# Altium PCB PCB.PcbDoc
Units mm, origin at the board's own origin, x right, y up, seen from the top; angles counter-clockwise.
Board outline 80 x 34 mm, 2 copper layers (Top Layer, Bottom Layer); 41 components, 44 nets, 176 pads, 12 vias.
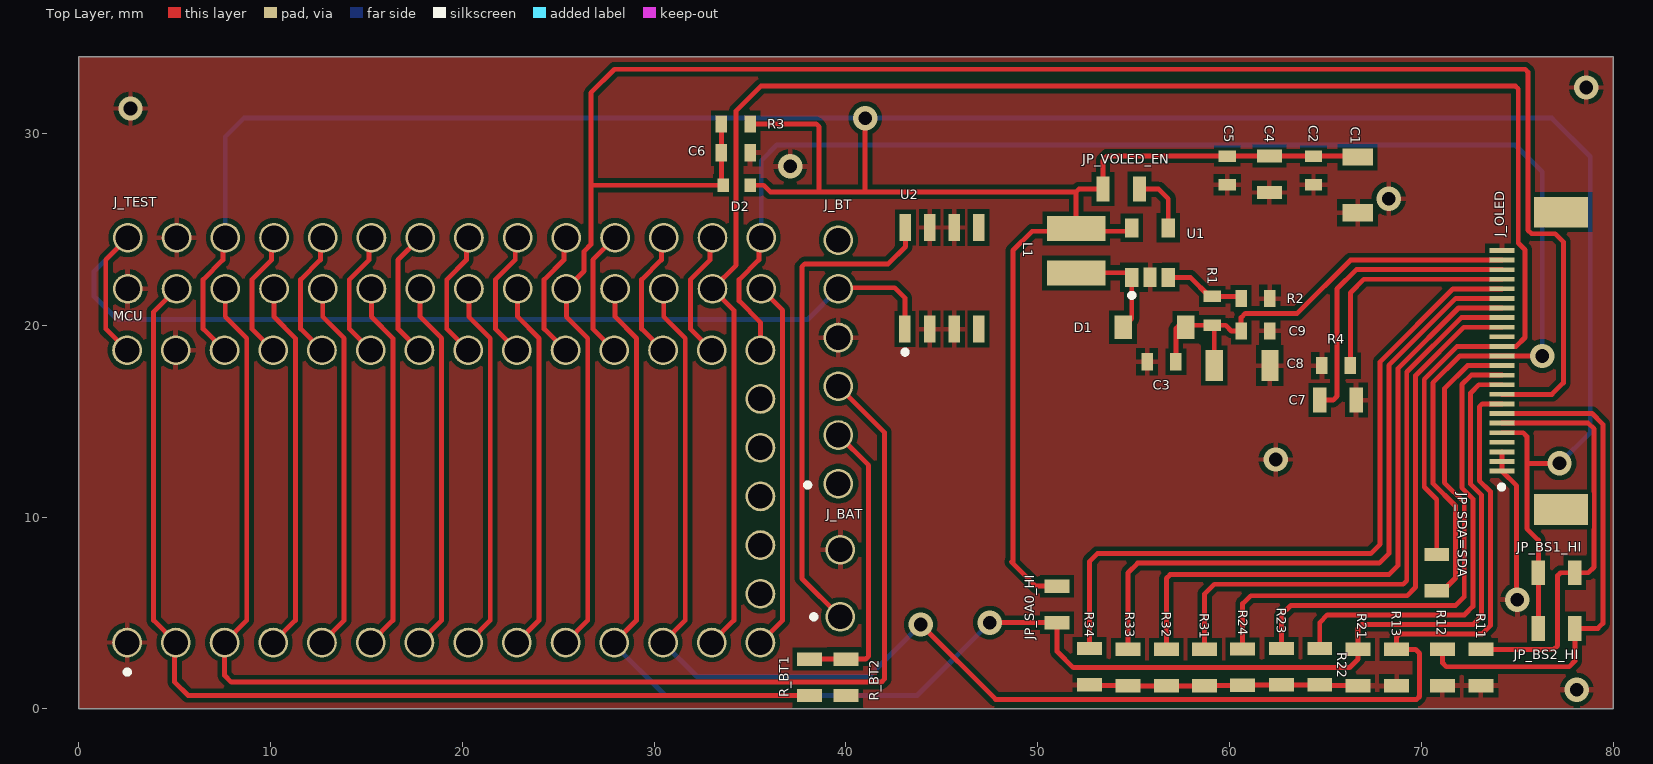
[diagram p0: Top Layer view]
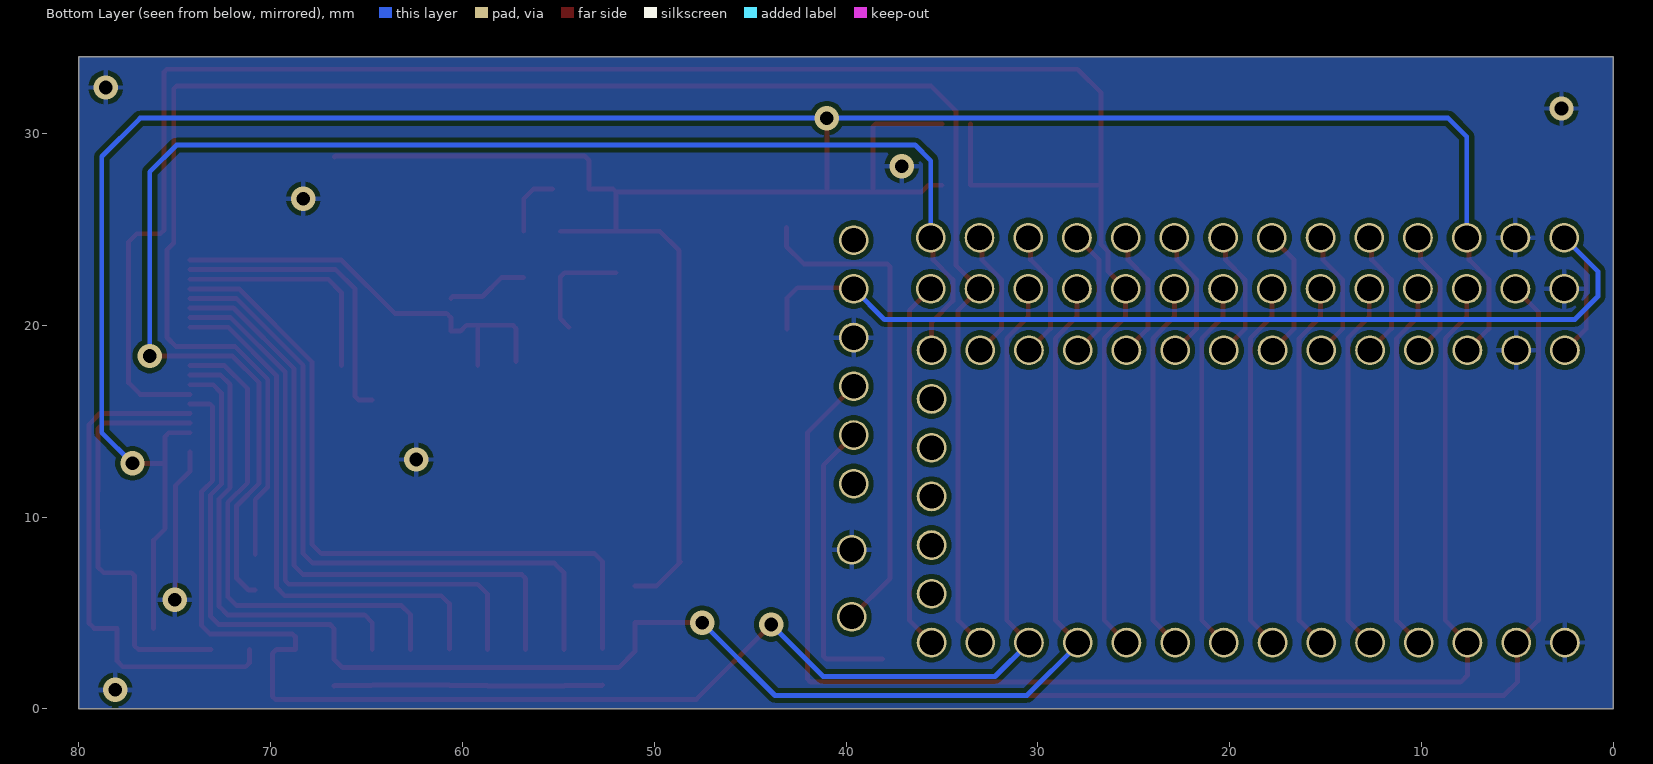
[diagram p1: Bottom Layer view, seen from below]

## Layer stack, top to bottom
Top Solder: solder mask 0.0102, Solder Resist, Dk 3.5
Top Layer: signal copper 0.0356
Dielectric 1: dielectric 0.32, FR-4, Dk 4.8
Bottom Layer: signal copper 0.0356
Bottom Solder: solder mask 0.0102, Solder Resist, Dk 3.5

## Board outline
0,0 80,0 80,34 0,34

## Design rules (kind name [scope] priority, off if disabled: settings)
Clearance [All] p1: gap=0.254 ignorepadtopadclearanceinfootprint=FALSE except(0: Arc-Hole Track-Hole SMDPad-Hole THPad-Hole Via-Hole Fill-Hole Poly-Hole Region-Hole Text-Hole; 0.2: Arc-Arc Arc-Track Arc-SMDPad Track-Track Track-SMDPad SMDPad-SMDPad)
PolygonConnect [All] p1: connectstyle=Relief reliefconductorwidth=0.254 reliefentries=4 polygonreliefangle="90 Angle" airgapwidth=0.254
RoutingVias [All] p1: holewidth=0.711 width=1.27 viastyle="Through Hole" minholewidth=0.711 minwidth=1.27 maxholewidth=0.711 maxwidth=1.27
SolderMaskExpansion [All] p1: expansion=0.102 istentingtop=FALSE
Width [All] p1: maxlimit=0.254 minlimit=0.254 preferedwidth=0.254
30 further rules are at their usual default settings.

## Classes and differential pairs
component class OLED_BREAKOUT: C1 C2 C3 C4 C5 C6 C7 C8 C9 D1 D2 J_OLED JP_BS1_HI JP_BS2_HI JP_SA0_HI JP_SDA=SDA JP_VOLED_EN L1 R1 R2 R3 R4 R11 R12 R13 R21 R22 R23 R24 R31 R32 R33 R34 U1
component class MCU: J_BAT J_BT J_TEST MCU R_BT1 R_BT2 U2

## Components (designator, comment, footprint, x,y, rotation, side; value= is the part's Value field where it differs from the comment)
C1 "Capacitor" SMD-1206 66.673,26.323 r90 top
C2 "Capacitor" SMD-0603 64.373,27.625 r90 top
C3 "Capacitor" SMD-0603 56,18.1 r0 top
C4 "Capacitor" SMD-0805 62.073,27.275 r90 top
C5 "Capacitor" SMD-0603 59.873,27.625 r90 top
C6 "Capacitor" SMD-0603 34.7,29 r180 top
C7 "Capacitor" SMD-0805 66.25,16.1 r180 top
C8 "Capacitor" SMD-1206 61.65,17.9 r180 top
C9 "Capacitor" SMD-0603 61.8,19.7 r180 top
D1 "Diode Schottky" D1_SOD-123 54.9,19.9 r0 top
D2 "Diode Schottky" D2_SOD523 33.9,27.3 r0 top
J_BAT "9V CONN" 2POS_TERMINAL 39.7,4.8 r90 top
J_BT "BLUETOOTH" HC05 39.6,11.74 r90 top
J_OLED "OLED Connector" J_OLED 74.23,17.91 r90 top
J_TEST "Test Pins" TESTPINS 2.56,24.567 r0 top
JP_BS1_HI "Jumper" SMD-0805 76.45,7.1 r0 top
JP_BS2_HI "Jumper" SMD-0805 76.45,4.2 r0 top
JP_SA0_HI "Jumper" SMD-0805 51,4.85 r90 top
JP_SDA=SDA "Jumper" SMD-0805 70.8,6.5 r90 top
JP_VOLED_EN "Jumper" SMD-0805 54.95,27.1 r180 top
L1 "Inductor" L1 52,24.4 r270 top
MCU "Teensy 4.0" "TEENSY 4.0" 2.52,18.7 r0 top
R1 "Resistor" SMD-0603 59.1,21.2 r270 top
R2 "Resistor" SMD-0603 61.798,21.4 r180 top
R3 "Resistor" SMD-0603 33.802,30.5 r0 top
R4 "Resistor" SMD-0603 65.1,17.9 r0 top
R11 "Resistor" SMD-0805 73.1,2.75 r270 top
R12 "Resistor" SMD-0805 71.1,2.75 r270 top
R13 "Resistor" SMD-0805 68.7,2.75 r270 top
R21 "Resistor" SMD-0805 66.7,2.75 r270 top
R22 "Resistor" SMD-0805 64.7,2.8 r270 top
R23 "Resistor" SMD-0805 62.7,2.8 r270 top
R24 "Resistor" SMD-0805 60.673,2.775 r270 top
R31 "Resistor" SMD-0805 58.7,2.75 r270 top
R32 "Resistor" SMD-0805 56.7,2.75 r270 top
R33 "Resistor" SMD-0805 54.7,2.75 r270 top
R34 "Resistor" SMD-0805 52.7,2.8 r270 top
R_BT1 "1K" SMD-0805 38.1,1.05 r90 top
R_BT2 "2K" SMD-0805 40,1.05 r90 top
U1 "DC/DC Voltage Regulator" U1_SOT-23-5 55.86,23.78 r0 top
U2 "5V Voltage Regulator 9V Battery" U2_SO-8 43.1,19.8 r0 top

## Footprints (in the part's own frame and the unit in brackets; to place one, negate y for a bottom-side part, rotate by r counter-clockwise, add the part's x,y. Pads: shape width x height; smd on the part's side, far side on the other; paste and mask are expansions set on the pad)
2POS_TERMINAL [mm]
  round 1.55 hole 1.28: 1(0,0) 2(3.5,0)
  silkscreen extent -0.11,1.27 0.11,1.49
D1_SOD-123 [mm]
  rect 0.91x1.22 smd: 1(-0.456,0) 2(2.815,0)
D2_SOD523 [mm]
  rect 0.6x0.7 smd: 1(-0.3,0) 2(1.1,0)
HC05 [mm]
  round 1.55 hole 1.28: 1(0,0) 2(2.54,0) 3(5.08,0) 4(7.62,0) 5(10.16,0) 6(12.7,0)
  silkscreen extent -0.18,1.49 0.04,1.71
J_OLED [mm]
  rect 0.25x1.3 smd: 1(-5.51,0.03) 2(-5.01,0.03) 3(-4.51,0.03) 4(-4.01,0.03) 5(-3.51,0.03) 6(-3.01,0.03) 7(-2.51,0.03) 8(-2.01,0.03) 9(-1.51,0.03) 10(-1.01,0.03) 11(-0.51,0.03) 12(-0.01,0.03) 13(0.49,0.03) 14(0.99,0.03) 15(1.49,0.03) 16(1.99,0.03) 17(2.49,0.03) 18(2.99,0.03) 19(3.49,0.03) 20(3.99,0.03) 21(4.49,0.03) 22(4.99,0.03) 23(5.49,0.03) 24(5.99,0.03)
  rect 1.6x2.8 smd: 25(-7.51,-3.05) 26(7.99,-3.05)
  silkscreen extent -6.45,-0.06 -6.23,0.16
L1 [mm]
  rect 1.3x3.05 smd: 1(-0.65,0) 2(1.67,0)
SMD-0603 [mm]
  rect 0.6x0.9 smd: 1(-0.302,0) 2(1.2,0)
SMD-0805 [mm]
  rect 0.7x1.3 smd: 1(-0.35,0) 2(1.55,0)
SMD-1206 [mm]
  rect 0.9x1.6 smd: 1(-0.45,0) 2(2.45,0)
"TEENSY 4.0" [mm]
  round 1.55 hole 1.28: 0(2.54,-15.24) 1(5.08,-15.24) 2(7.62,-15.24) 3(10.16,-15.24) 4(12.7,-15.24) 5(15.24,-15.24) 6(17.78,-15.24) 7(20.32,-15.24) 8(22.86,-15.24) 9(25.4,-15.24) 10(27.94,-15.24) 11(30.48,-15.24) 12(33.02,-15.24) 13(33.02,0) 14(30.48,0) 15(27.94,0) 16(25.4,0) 17(22.86,0) 18(20.32,0) 19(17.78,0) 20(15.24,0) 21(12.7,0) 22(10.16,0) 23(7.62,0) 24(5.08,0) 25(2.54,0) 26(0,0) 27(0,-15.24) 28(33.02,-12.7) 29(33.02,-10.16) 30(33.02,-7.62) 31(33.02,-5.08) 32(33.02,-2.54)
  silkscreen extent -0.1,-16.89 0.12,-16.67
TESTPINS [mm]
  round 1.55 hole 1.28: 0(2.54,-2.667) 1(5.08,-2.667) 2(7.62,-2.667) 3(10.16,-2.667) 4(12.7,-2.667) 5(15.24,-2.667) 6(17.78,-2.667) 7(20.32,-2.667) 8(22.86,-2.667) 9(25.4,-2.667) 10(27.94,-2.667) 11(30.48,-2.667) 12(33.02,-2.667) 13(33.02,0) 14(30.48,0) 15(27.94,0) 16(25.4,0) 17(22.86,0) 18(20.32,0) 19(17.78,0) 20(15.24,0) 21(12.7,0) 22(10.16,0) 23(7.62,0) 24(5.08,0) 25(2.54,0) 26(0,0) 27(0,-2.667)
U1_SOT-23-5 [mm]
  rect 0.7x1 smd: 1(-0.96,-1.28) 2(-0.01,-1.279) 3(0.94,-1.28) 4(0.94,1.3) 5(-0.96,1.3)
  silkscreen extent -1.07,-2.33 -0.85,-2.11
U2_SO-8 [mm]
  rect 0.6x1.4 smd: 1(-0.03,0) 2(1.27,0) 3(2.54,0) 4(3.81,0) 5(3.81,5.3) 6(2.54,5.3) 7(1.27,5.3) 8(0,5.3)
  silkscreen extent -0.13,-1.31 0.09,-1.09

## Part data
C1: Capactiance=10uF, Size=1206
C2 C3: Capacitance=1uF, Size=0603
C4: Capacitance=4.6uF, Size=0805
C5 C6 C9: Capacitance=0.1uF, Size=0603
C7: Capacitance=4.7uF, Size=0805
C8: Capacitance=10uF, Size=1206
J_BAT: library part "Battery Connector"
J_BT: library part HC05
J_OLED: "24 Position, 0.5mm Pitch, Gold, FCC FPC ZIF Connector"
JP_BS1_HI JP_BS2_HI JP_SA0_HI JP_SDA=SDA JP_VOLED_EN: "Jumper Wire", LatestRevisionDate=17-Jul-2002, LatestRevisionNote="Re-released for DXP Platform.", PackageDescription="Radial Cap, Thru-Hole; 2 Leads; 0.2 in Pin Spacing", PackageReference=RAD-0.2, Published=24-Mar-1999, Publisher="Altium Limited"
L1: Inductance=10uH
R1: Resistance=47K, Size=0603
R2 R3: Resistance=5.1K, Size=0603
R4: Resistance=910K, Size=0603
R11 R12 R13 R21 R22 R23 R24 R31 R32 R33 R34: Resistance=100K, Size=0805
R_BT1 R_BT2: library part Resistor
U1: "Integrated Circuits (ICs) / PMIC - Voltage Regulators - DC DC Switching Regulators", Part#=AP3012KTR-G1

## Via types
v1: diameter 1.27, hole 0.711, Top Layer to Bottom Layer, 12 vias

## Nets (pads, with @x,y where several pads share a name; then routed paths per layer and width w, separated by ;. In a path a pad name is that pad's centre, name@x,y a point inside that pad or via, vN(x,y) a via of type N, cw(c..) or ccw(c..) an arc to the next point about the centre after c; other vN are vias at no path point)
2: J_TEST.2 MCU.2 | length 19.4
  Top Layer w0.254: MCU.2 11.296,4.616 11.296,19.327 10.18,20.443 J_TEST.2
3: J_TEST.3 MCU.3 | length 19.4
  Top Layer w0.254: MCU.3 13.836,4.616 13.836,19.327 12.72,20.443 J_TEST.3
4: J_TEST.4 MCU.4 | length 19.4
  Top Layer w0.254: MCU.4 16.376,4.616 16.376,19.327 15.26,20.443 J_TEST.4
5: J_TEST.5 MCU.5 | length 19.4
  Top Layer w0.254: MCU.5 18.916,4.616 18.916,19.327 17.8,20.443 J_TEST.5
5V: J_BT.5 J_TEST.26 MCU.26 U2.1 | length 55.9
  Top Layer w0.254: MCU.26 1.404,19.816 1.404,23.411 J_TEST.26 ; J_BT.5@39.6,21.96 42.54,21.96 43.07,21.43 U2.1
  Bottom Layer w0.254: J_TEST.26 0.8,22.807 0.8,21.5 2,20.3 38,20.3 J_BT.5
6: J_TEST.6 MCU.6 | length 19.4
  Top Layer w0.254: MCU.6 21.456,4.616 21.456,19.327 20.34,20.443 J_TEST.6
7: J_TEST.7 MCU.7 | length 19.4
  Top Layer w0.254: MCU.7 23.996,4.616 23.996,19.327 22.88,20.443 J_TEST.7
9V: J_BAT.1 U2.8 | length 25.9
  Top Layer w0.254: J_BAT.1 37.7,6.8 37.7,23.051 37.774,23.126 37.849,23.2 42.2,23.2 43.1,24.1 U2.8
12: J_TEST.12 MCU.12 | length 19.4
  Top Layer w0.254: MCU.12 36.696,4.616 36.696,20.784 J_TEST.12
14: J_TEST.14 MCU.14 | length 6.8
  Top Layer w0.254: MCU.14 31.884,19.816 31.884,22.379 32.916,23.411 32.916,24.443 J_TEST.14
15: J_TEST.15 MCU.15 | length 6.8
  Top Layer w0.254: MCU.15 29.344,19.816 29.344,22.379 30.376,23.411 30.376,24.443 J_TEST.15
16: J_TEST.16 MCU.16 | length 6.8
  Top Layer w0.254: MCU.16 26.804,19.816 26.804,23.411 J_TEST.16
17: J_TEST.17 MCU.17 | length 6.8
  Top Layer w0.254: MCU.17 24.264,19.816 24.264,22.379 25.296,23.411 25.296,24.443 J_TEST.17
18: J_TEST.18 MCU.18 | length 6.8
  Top Layer w0.254: MCU.18 21.724,19.816 21.724,22.379 22.756,23.411 22.756,24.443 J_TEST.18
19: J_TEST.19 MCU.19 | length 6.8
  Top Layer w0.254: MCU.19 19.184,19.816 19.184,22.379 20.216,23.411 20.216,24.443 J_TEST.19
20: J_TEST.20 MCU.20 | length 6.8
  Top Layer w0.254: MCU.20 16.644,19.816 16.644,23.411 J_TEST.20
21: J_TEST.21 MCU.21 | length 6.8
  Top Layer w0.254: MCU.21 14.104,19.816 14.104,22.379 15.136,23.411 15.136,24.443 J_TEST.21
22: J_TEST.22 MCU.22 | length 6.8
  Top Layer w0.254: MCU.22 11.564,19.816 11.564,22.379 12.596,23.411 12.596,24.443 J_TEST.22
23: J_TEST.23 MCU.23 | length 6.8
  Top Layer w0.254: MCU.23 9.024,19.816 9.024,22.379 10.056,23.411 10.056,24.443 J_TEST.23
+3.3V: C1.2 C2.2 C4.2 C5.2 D2.2 J_OLED.5 J_TEST.24 JP_BS1_HI.1 JP_BS2_HI.1 JP_SA0_HI.2 JP_VOLED_EN.2 L1.1 MCU.24 R3.2 U1.5 | length 186.8
  Top Layer w0.254: MCU.24 6.484,19.816 6.484,22.379 7.516,23.411 7.516,24.443 J_TEST.24 J_TEST.24@7.7,24.627 ; D2.2 35.707,27.3 36.049,26.959 38.6,26.959 ; R3.2 38.451,30.5 38.6,30.351 38.6,26.959 ; v1(41,30.8) 41,26.959 ; 48.626,7.674 49.9,6.4 JP_SA0_HI.2 ; 48.7,7.6 48.7,23.9 49.7,24.9 L1.1@52,24.9 ; U1.5@54.9,24.9 L1.1@52,24.9 ; C1.2 66.621,28.825 C2.2 C4.2 C5.2 53.625,28.825 53.4,28.6 JP_VOLED_EN.2 52.141,27.1 52,26.959 ; J_OLED.5 75.3,14.4 75.5,14.2 75.5,12.8 ; JP_BS2_HI.1 JP_BS1_HI.1 ; JP_BS1_HI.1 76.1,8.8 75.5,9.4 75.5,12.8 ; v1(77.2,12.8) 75.5,12.8 ; 38.6,26.959 41,26.959 ; 41,26.959 52,26.959 ; L1.1@52,24.9 52,26.959
  Bottom Layer w0.254: J_TEST.24 7.64,29.84 8.6,30.8 76.8,30.8 78.8,28.8 78.8,14.4 v1(77.2,12.8)
BS1: J_OLED.6 JP_BS1_HI.2 R11.1 | length 22
  Top Layer w0.254: R11.1 76.9,3.1 77.1,3.3 77.1,6.951 77.249,7.1 JP_BS1_HI.2 78.7,7.1 78.996,7.396 78.996,9.36 79.007,9.371 79.007,11.335 79.003,11.34 79.003,14.597 78.7,14.9 J_OLED.6
BS2: J_OLED.7 JP_BS2_HI.2 R12.1 | length 26.9
  Top Layer w0.254: R12.1 71.1,2.4 71.3,2.2 77.7,2.2 78,2.5 78,4.2 79.2,4.2 79.461,4.461 79.461,14.839 78.9,15.4 J_OLED.7
C\S\: J_OLED.8 J_TEST.10 MCU.10 R13.1 | length 84.6
  Top Layer w0.254: MCU.10 31.616,4.616 31.616,19.327 30.5,20.443 J_TEST.10 ; v1(43.9,4.4) 47.8,0.5 69.751,0.5 69.9,0.649 69.9,2.9 69.7,3.1 R13.1 68.7,3.751 68.849,3.9 73.151,3.9 73.593,4.342 73.593,11.333 73.02,11.906 73.02,15.751 73.169,15.9 J_OLED.8
  Bottom Layer w0.254: MCU.10 32.23,1.69 41.19,1.69 v1(43.9,4.4)
D0: J_OLED.13 J_TEST.13 JP_SDA=SDA.1 MCU.13 | length 80.2
  Top Layer w0.254: MCU.13 35.54,20.157 34.424,21.273 34.424,22.379 35.456,23.411 35.456,24.443 J_TEST.13 ; JP_SDA=SDA.1@70.8,6.2 71.15,6.2 71.777,6.827 71.777,10.581 70.6,11.758 70.6,17 72,18.4 J_OLED.13 v1(76.3,18.4)
  Bottom Layer w0.254: J_TEST.13 35.58,28.58 36.4,29.4 74.9,29.4 76.3,28 v1(76.3,18.4)
D1: J_OLED.14 J_TEST.11 JP_SDA=SDA.2 MCU.11 | length 99.2
  Top Layer w0.254: MCU.11 34.156,4.616 34.156,20.784 J_TEST.11 34.273,23.133 34.273,31.181 35.565,32.473 74.897,32.473 75.046,32.324 75.046,24.291 75.4,23.937 75.4,19.363 74.939,18.902 74.202,18.902 J_OLED.14 71.858,18.9 70.146,17.188 70.146,11.57 70.8,10.916 JP_SDA=SDA.2
D3: J_OLED.16 R24.1 | length 28.3
  Top Layer w0.254: R24.1 60.673,5.495 ; 60.684,5.484 61.1,5.9 69.251,5.9 69.692,6.341 69.692,17.376 72.216,19.9 J_OLED.16
D4: J_OLED.17 R31.1 | length 30.7
  Top Layer w0.254: R31.1 58.7,6 59.2,6.5 69.051,6.5 69.238,6.687 69.238,17.564 72.074,20.4 J_OLED.17
D5: J_OLED.18 R32.1 | length 33.1
  Top Layer w0.254: R32.1 56.7,6.8 56.9,7 68.3,7 68.784,7.484 68.784,17.752 71.932,20.9 J_OLED.18
D6: J_OLED.19 R33.1 | length 35.2
  Top Layer w0.254: R33.1 54.7,7.1 55.2,7.6 67.8,7.6 68.3,8.1 68.3,17.91 71.79,21.4 J_OLED.19
D7: J_OLED.20 R34.1 | length 37.5
  Top Layer w0.254: R34.1 52.7,7.7 53.1,8.1 67.354,8.1 67.846,8.592 67.846,18.098 71.648,21.9 J_OLED.20
D/C\: J_OLED.10 J_TEST.9 JP_SA0_HI.1 MCU.9 R21.1 | length 85
  Top Layer w0.254: MCU.9 29.076,4.616 29.076,19.327 27.96,20.443 J_TEST.9 ; v1(47.5,4.5) JP_SA0_HI.1 51,3 51.85,2.15 66.25,2.15 66.7,2.6 R21.1 66.7,4.2 66.9,4.4 72.697,4.4 73.139,4.842 73.139,11.145 72.566,11.718 72.566,16.471 72.995,16.9 J_OLED.10
  Bottom Layer w0.254: MCU.9 27.92,3.353 30.573,0.7 43.7,0.7 v1(47.5,4.5)
E/R\D\: J_OLED.12 R23.1 | length 26.5
  Top Layer w0.254: R23.1@62.7,3.1 62.7,4.9 63.2,5.4 71.789,5.4 72.231,5.842 72.231,10.769 71.2,11.8 71.2,16.7 72.4,17.9 J_OLED.12
GND: C1.1 C2.1 C3.1 C4.1 C5.1 C6.1 C7.1 C8.1 C9.1 J_BAT.2 J_BT.4 J_OLED.1 J_OLED.2 J_OLED.3 J_OLED.24 J_TEST.25 J_TEST.27 MCU.25 MCU.27 R2.1 R4.1 R11.2 R12.2 R13.2 R21.2 R22.2 R23.2 R24.2 R31.2 R32.2 R33.2 R34.2 R_BT2.1 U1.2 U2.2 U2.3 U2.6 U2.7 | length 22.1
  Top Layer w0.254: R34.2 52.725,1.225 54.675,1.225 R33.2 R32.2 R31.2 58.712,1.212 60.661,1.212 R24.2 60.686,1.237 62.687,1.237 R23.2 R22.2 64.725,1.225 66.675,1.225 R21.2 ; J_OLED.3 J_OLED.2 J_OLED.1 74.964,11.636 74.964,5.736 v1(75,5.7)
  other v1: 78.1,1 62.4,13 68.3,26.6 37.1,28.3 2.7,31.3 78.6,32.4
NetC7_2: C7.2 J_OLED.22 | length 15.6
  Top Layer w0.254: C7.2 65.4,16.1 65.6,16.3 65.6,21.9 66.6,22.9 J_OLED.22
NetD1_1: D1.1 L1.2 U1.1 | length 5.8
  Top Layer w0.254: L1.2@52,22.74 54.677,22.74 54.9,22.517 U1.1 54.9,20.356 D1.1
NetJ_BT_2: J_BT.2 R_BT1.2 R_BT2.2 | length 15.3
  Top Layer w0.254: R_BT1.2 41.031,2.6 41.18,2.749 41.18,12.7 J_BT.2
NetJ_OLED_21: J_OLED.21 R4.2 | length 12
  Top Layer w0.254: R4.2 66.3,21.7 67,22.4 J_OLED.21
NetR1_1: R1.1 R2.2 U1.3 | length 4.3
  Top Layer w0.254: U1.3 57.952,22.5 58.95,21.502 R1.1 60.497,21.502 R2.2
R/W\R\: J_OLED.11 R22.1 | length 23.8
  Top Layer w0.254: R22.1@64.7,3.1 64.7,4.5 65.1,4.9 72.243,4.9 72.685,5.342 72.685,10.957 72.112,11.53 72.112,16.912 72.6,17.4 J_OLED.11
R\S\T\: C6.2 D2.1 J_OLED.9 J_TEST.8 MCU.8 R3.1 | length 110.7
  Top Layer w0.254: MCU.8 26.536,4.616 26.536,19.327 25.42,20.443 J_TEST.8 26.35,22.83 26.35,23.862 26.7,24.212 26.7,27.3 ; R3.1 C6.2 33.5,27.3 26.7,27.3 ; J_OLED.9 76.8,16.4 77.4,17 77.4,24.351 76.978,24.773 75.745,24.773 75.553,24.965 75.553,33.198 75.404,33.347 27.933,33.347 26.7,32.114 26.7,27.3
RX1: J_TEST.0 MCU.0 R_BT1.1 | length 54.9
  Top Layer w0.254: J_TEST.0 3.904,20.704 3.904,4.616 MCU.0 5,3.4 5,1.4 5.7,0.7 R_BT1.1
TX1: J_BT.3 J_TEST.1 MCU.1 | length 72
  Top Layer w0.254: J_TEST.1 7.64,20.443 8.756,19.327 8.756,4.616 MCU.1 7.6,1.749 7.949,1.4 41.851,1.4 42,1.549 42,14.42 J_BT.3
VOLED: C3.2 C8.2 C9.2 D1.2 J_OLED.23 R1.2 | length 22.9
  Top Layer w0.254: C3.2 57.2,19.84 57.26,19.9 57.36,20 R1.2 59.8,20 60.1,19.7 C9.2 60.6,20.4 60.823,20.623 63.523,20.623 66.3,23.4 J_OLED.23 ; C8.2 R1.2@59.2,19.9
VOLED_EN: JP_VOLED_EN.1 U1.4 | length 3.4
  Top Layer w0.254: JP_VOLED_EN.1 56.3,27.1 56.8,26.6 U1.4@56.8,24.9
pads on no net: J_BT.1 J_BT.6 J_OLED.4 J_OLED.15 J_OLED.25 J_OLED.26 MCU.28 MCU.29 MCU.30 MCU.31 MCU.32 U2.4 U2.5

## Polygon pours and split planes (outlines as drawn)
GND on Bottom Layer "GND_L02_P007" (solid, pour order 7): 0,34 0,0 80,0 80,34
GND on Top Layer "GND_L01_P002" (solid, pour order 2): 0,34 80,34 80,0 0,0

## Silkscreen, mask and mechanical layers (free items; w line width, h text height)
Mechanical 1:
  the board outline again, w0.254